# EAGLE board board (EAGLE 9.7.0)
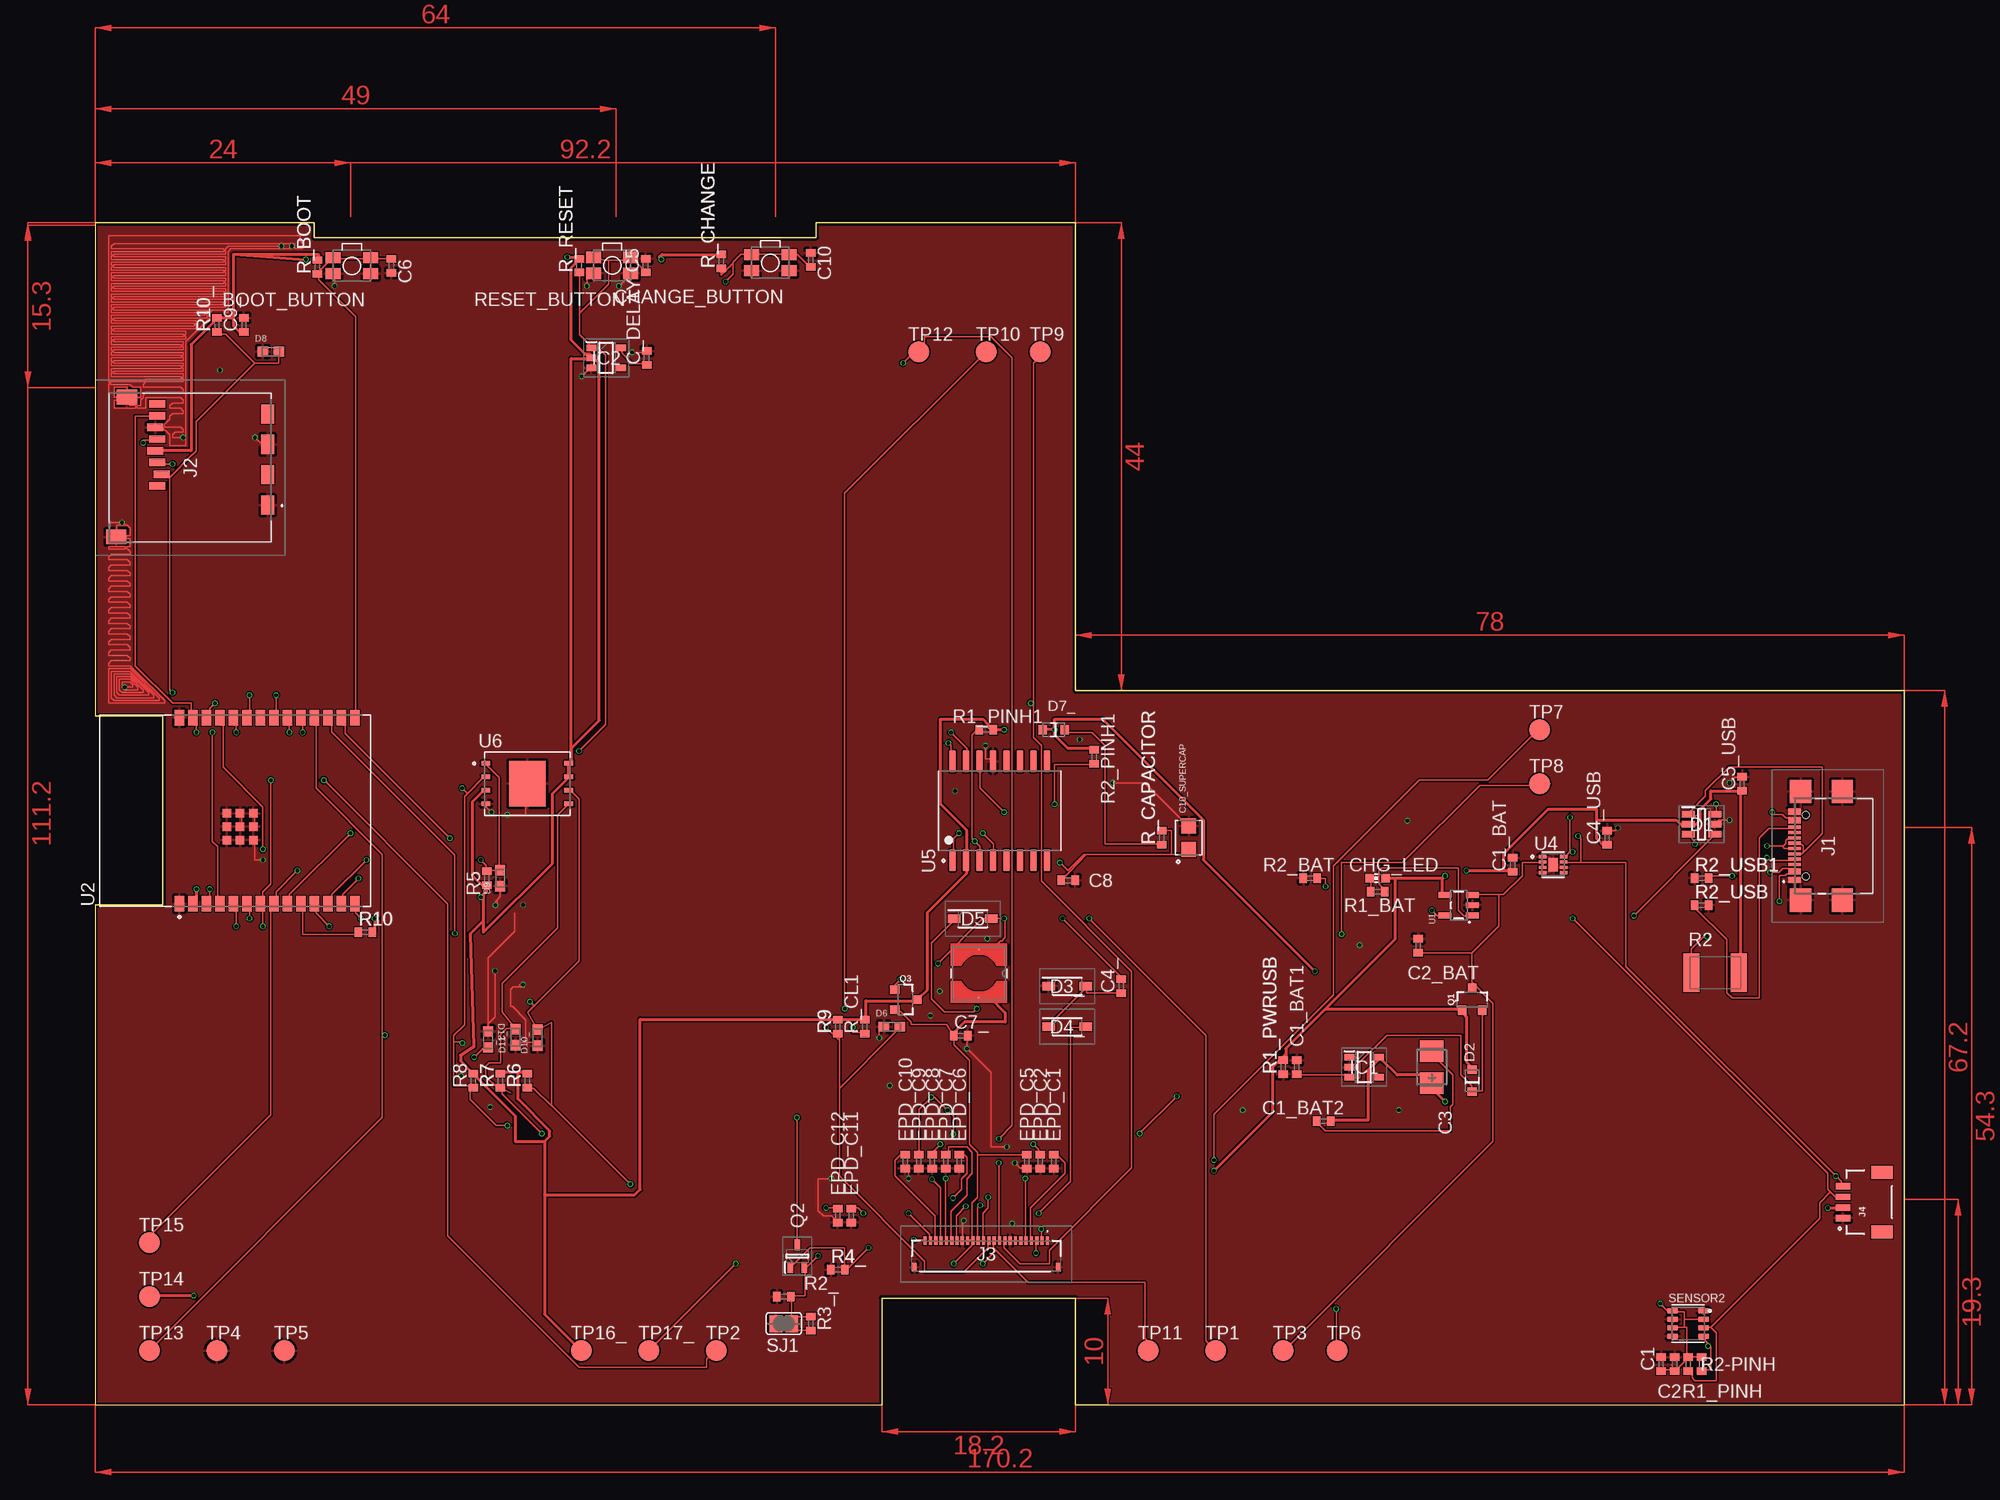
[diagram p0: board, top side]
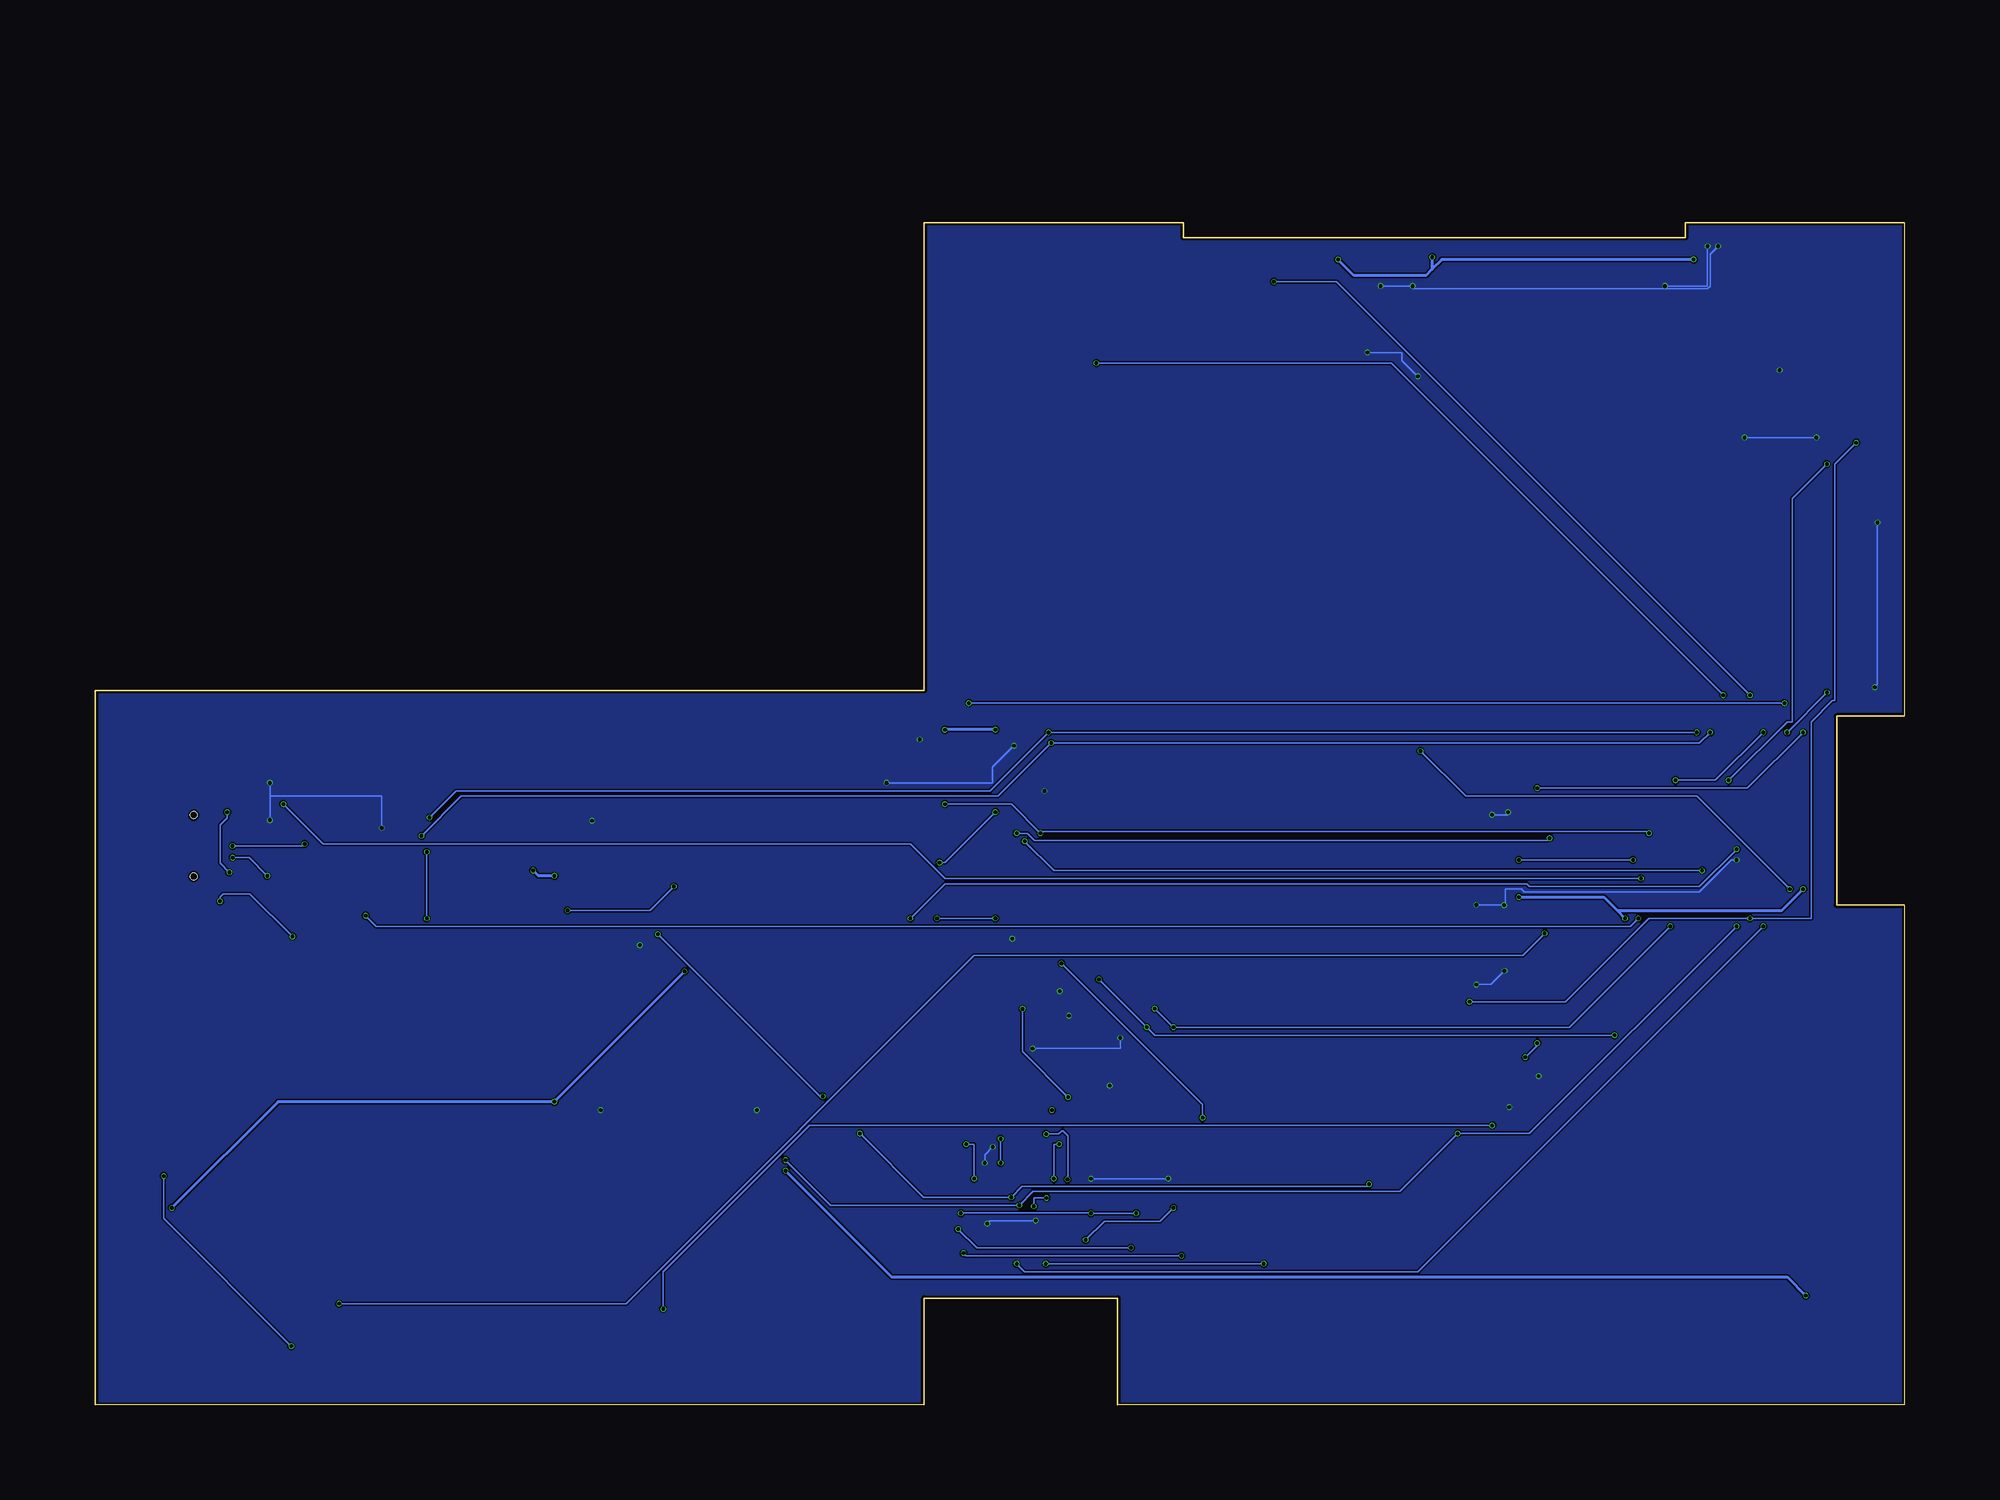
[diagram p1: board, bottom side, seen from below]

Size 170.2 x 111.2 mm. Coordinates in mm from the lower left corner, seen from the top.
Outline: 0,0 74,0 74,10 92.2,10 92.2,0 170.2,0 170.2,67.2 92.2,67.2 92.2,111.2 67.83,111.2 67.83,109.81 20.56,109.81 20.56,111.2 0,111.2 0,64.77 6.35,64.77 6.35,46.99 0,46.99 0,0
Copper layers (1*16): Top 0.035mm / dielectric 1.6mm / Bottom 0.035mm
Design rules "jlcpcb-2layers.dru *": minimum track width 5mil, minimum drill 0.3mm, track to track 5mil, track to pad 5mil, pad to pad 5mil, via to via 5mil, smd to smd 5mil, copper to edge 0.2mm, drill to drill 6mil, minimum pad ring 10mil, minimum via ring 3mil, stop-mask expansion 4mil, vias tented up to drill 0mil, thermal gap 10mil

## Footprints (pad centres in the part's own frame; a part is rotated, then mirrored left to right if it is on the bottom)
MYBUTTON = smd 1.4 x 1.05: 1 1.75,0.75; 2 -1.75,0.75; 3 -1.75,-0.75; 4 1.75,-0.75
EAGLE-LTSPICE_C0402 = smd 0.7 x 0.9: 1 -0.65,0; 2 0.65,0
RCL_CT3528 = smd 2 x 2.2: + -1.5,0; - 1.5,0
ESP32_WROVER_EAGLE-LTSPICE_C0402 = smd 0.7 x 0.9: 1 -0.65,0; 2 0.65,0
CAPCP3225X100N = smd 1.4 x 1.4: 1 -1.1,0; 2 1.1,0
ADAFRUIT_CHIP-LED0603 = smd 0.8 x 0.8: A 0,-0.75; C 0,0.75
SOT95P280X145-6N = smd 1.2 x 0.6: 1 -1.25,0.95; 2 -1.25,0; 3 -1.25,-0.95; 4 1.25,-0.95; 5 1.25,0; 6 1.25,0.95
ESP32_WROVER_AVX---SD0805S020S1R0_AVX_SD0805S020S1R0_0 = smd 0.8 x 0.9: 1 -1.05,0; 2 1.05,0
SOD3716X135N = smd 1.15 x 0.8: 1 -1.75,0; 2 1.75,0
DIOC1608X36N = smd 0.97 x 0.94: 1 -0.75,0; 2 0.75,0
SOT95P280X120-5N = smd 0.9 x 0.6: 1 -1.4,0.95; 2 -1.4,0; 3 -1.4,-0.95; 4 1.4,-0.95; 5 1.4,0.95
SOT95P280X125-5N = smd 0.9 x 0.6: 1 -1.4,0.95; 2 -1.4,0; 3 -1.4,-0.95; 4 1.4,-0.95; 5 1.4,0.95
SAMACSYS_PARTS_USB4110GFA = smd 0.3 x 1.15: A1 -3.35,3.678; A4 -2.55,3.678; A5 -1.25,3.678; A6 -0.25,3.678; A7 0.25,3.678; A8 1.25,3.678; A9 2.55,3.678; A12 3.35,3.678; B1 3.05,3.678; B4 2.25,3.678; B5 1.75,3.678; B6 0.75,3.678; B7 -0.75,3.678; B8 -1.75,3.678; B9 -2.25,3.678; B12 -3.05,3.678 | smd 2.18 x 2: MP1 -5.11,-0.827; MP2 5.11,-0.827; MP3 -5.11,3.103; MP4 5.11,3.103 | hole 0.65: -2.89,2.603; 2.89,2.603
112ATAARR03ATTEND = smd 1.8 x 1.2: G1 10.6,10.4; G2 4.9,10.4; S1 7.75,10.4; S2 2.05,10.4 | smd 1.4 x 1.9: G3 13.6,-3.85; G4 0.45,-2.85 | smd 0.7 x 1.5: P1 8.8,0; P2 7.7,0.4; P3 6.6,0; P4 5.5,-0.2; P5 4.4,0; P6 3.3,-0.2; P7 2.2,0; P8 1.1,0
FH34SRJ24S05SH99 = smd 0.3 x 0.8: 1 5.75,1.45; 2 5.25,1.45; 3 4.75,1.45; 4 4.25,1.45; 5 3.75,1.45; 6 3.25,1.45; 7 2.75,1.45; 8 2.25,1.45; 9 1.75,1.45; 10 1.25,1.45; 11 0.75,1.45; 12 0.25,1.45; 13 -0.25,1.45; 14 -0.75,1.45; 15 -1.25,1.45; 16 -1.75,1.45; 17 -2.25,1.45; 18 -2.75,1.45; 19 -3.25,1.45; 20 -3.75,1.45; 21 -4.25,1.45; 22 -4.75,1.45; 23 -5.25,1.45; 24 -5.75,1.45 | smd 0.4 x 0.8: MP1 6.75,-1.05; MP2 -6.75,-1.05
JST04_1MM_RA = smd 0.6 x 1.35: 1 -1.5,0; 2 -0.5,0; 3 0.5,0; 4 1.5,0 | smd 1.2 x 2: NC1 2.8,-3.675; NC2 -2.8,-3.675
IND_4828-WE-TPC_WRE = smd 0.127 x 0.127: 1 -2.286,0; 2 2.286,0
ESP32_WROVER_SPARKFUN-DISCRETESEMI_SOT23-3 = smd 0.8 x 0.9: 1 -0.95,-1; 2 0.95,-1; 3 0,1.1
SOT65P210X110-3N = smd 1.05 x 0.5: 1 -1.05,0.65; 2 -1.05,-0.65; 3 1.05,0
ESP32_WROVER_EAGLE-LTSPICE_R0402 = smd 0.7 x 0.9: 1 -0.65,0; 2 0.65,0
ESP32C6_VARISTOR_CT/CN1812 = smd 1.5 x 3.6: 1 -2.25,0; 2 2.25,0
ESP32_WROVER_BME680_PSON80P300X300X100-8N = smd 1.016 x 0.5: 1 1.458,1.2; 2 1.458,0.4; 3 1.458,-0.4; 4 1.458,-1.2; 5 -1.458,-1.22; 6 -1.458,-0.4; 7 -1.458,0.4; 8 -1.458,1.2
SJ = smd 1.168 x 1.6: 1 -0.762,0; 2 0.762,0
TP20R = smd 2 x 2: TP 0,0
ESP32_WROVER_SPARKFUN-IC-POWER_SOT23-5 = smd 0.55 x 1.2: 1 -0.95,-1.3; 2 0,-1.3; 3 0.95,-1.3; 4 0.95,1.3; 5 -0.95,1.3
XCVR_ESP32-C6-WROOM-1-N8 = smd 1.5 x 0.9: 1 -8.75,5.26; 2 -8.75,3.99; 3 -8.75,2.72; 4 -8.75,1.45; 5 -8.75,0.18; 6 -8.75,-1.09; 7 -8.75,-2.36; 8 -8.75,-3.63; 9 -8.75,-4.9; 10 -8.75,-6.17; 11 -8.75,-7.44; 12 -8.75,-8.71; 13 -8.75,-9.98; 14 -8.75,-11.25; 15 8.75,-11.25; 16 8.75,-9.98; 17 8.75,-8.71; 18 8.75,-7.44; 19 8.75,-6.17; 20 8.75,-4.9; 21 8.75,-3.63; 22 8.75,-2.36; 23 8.75,-1.09; 24 8.75,0.18; 25 8.75,1.45; 26 8.75,2.72; 27 8.75,3.99; 28 8.75,5.26 | smd 0.8 x 0.8: 29_1 -2.755,0.79; 29_2 -1.505,0.79; 29_3 -0.255,0.79; 29_4 -2.755,-0.46; 29_5 -1.505,-0.46; 29_6 -0.255,-0.46; 29_7 -2.755,-1.71; 29_8 -1.505,-1.71; 29_9 -0.255,-1.71
SON50P200X200X80-9N = smd 0.76 x 0.27: 1 -0.985,0.75; 2 -0.985,0.25; 3 -0.985,-0.25; 4 -0.985,-0.75; 5 0.985,-0.75; 6 0.985,-0.25; 7 0.985,0.25; 8 0.985,0.75 | smd 0.9 x 1.3: 9 0,0
SOIC127P1032X265-16N = smd 2.05 x 0.59: 1 -4.655,4.445; 2 -4.655,3.175; 3 -4.655,1.905; 4 -4.655,0.635; 5 -4.655,-0.635; 6 -4.655,-1.905; 7 -4.655,-3.175; 8 -4.655,-4.445; 9 4.655,-4.445; 10 4.655,-3.175; 11 4.655,-1.905; 12 4.655,-0.635; 13 4.655,0.635; 14 4.655,1.905; 15 4.655,3.175; 16 4.655,4.445
SON127P600X800X80-9N = smd 0.94 x 0.44: 1 -3.895,1.905; 2 -3.895,0.635; 3 -3.895,-0.635; 4 -3.895,-1.905; 5 3.895,-1.905; 6 3.895,-0.635; 7 3.895,0.635; 8 3.895,1.905 | smd 3.4 x 4.3: 9 0,0

## Placement (x,y rotation side)
BOOT_BUTTON  BUTTON_CUSYOMV1  [MYBUTTON]  24.13,107.16 180 top
C1  100nF  [EAGLE-LTSPICE_C0402]  147.32,3.81 90 top
C1_BAT  4.7uF  [EAGLE-LTSPICE_C0402]  133.35,50.8 90 top
C1_BAT1  4.7uF  [EAGLE-LTSPICE_C0402]  113.03,31.75 90 top
C1_BAT2  4.7uF  [EAGLE-LTSPICE_C0402]  115.57,26.67 180 top
C2  100nF  [EAGLE-LTSPICE_C0402]  148.59,3.81 90 top
C2_BAT  4.7uF  [EAGLE-LTSPICE_C0402]  124.46,43.18 90 top
C3  100uF  [RCL_CT3528]  125.73,31.75 90 top
C4_  4.7uF/25V  [EAGLE-LTSPICE_C0402]  96.52,39.37 90 top
C4_USB  100nF  [EAGLE-LTSPICE_C0402]  142.24,53.34 90 top
C5  1uF  [EAGLE-LTSPICE_C0402]  51.77,107.17 90 top
C5_USB  4.7uF  [EAGLE-LTSPICE_C0402]  154.94,58.42 90 top
C6  100nF  [ESP32_WROVER_EAGLE-LTSPICE_C0402]  27.84,107.14 270 top
C7_  10uF  [EAGLE-LTSPICE_C0402]  81.42,34.72 0 top
C8  100nF  [EAGLE-LTSPICE_C0402]  91.54,49.33 0 top
C9_  100nF  [ESP32_WROVER_EAGLE-LTSPICE_C0402]  13.97,101.6 90 top
C10  100nF  [ESP32_WROVER_EAGLE-LTSPICE_C0402]  67.31,107.72 90 top
C10_SUPERCAP  CPH3225A  [CAPCP3225X100N]  102.87,53.34 90 top
C_DELAY  100nF  [EAGLE-LTSPICE_C0402]  51.87,98.49 90 top
CHANGE_BUTTON  BUTTON_CUSYOMV1  [MYBUTTON]  63.5,107.44 180 top
CHG_LED  [ADAFRUIT_CHIP-LED0603]  120.65,49.53 90 top
D1  USBLC6-2SC6Y  [SOT95P280X145-6N]  151.13,54.61 0 top
D2  ESP32_WROVER_AVX---SD0805S020S1R0_AVX_SD0805S020S1R0_0_0AVX_SD0805S020S1R0_0_0  [ESP32_WROVER_AVX---SD0805S020S1R0_AVX_SD0805S020S1R0_0]  129.54,30.48 90 top
D3_  MBR0530  [SOD3716X135N]  91.44,39.37 0 top
D4_  MBR0530  [SOD3716X135N]  91.44,35.56 0 top
D5  MBR0530  [SOD3716X135N]  82.55,45.72 0 top
D6  PGB1010603MR  [DIOC1608X36N]  74.93,35.56 0 top
D7_  ESP32_WROVER_AVX---SD0805S020S1R0_AVX_SD0805S020S1R0_0_0AVX_SD0805S020S1R0_0_0  [ESP32_WROVER_AVX---SD0805S020S1R0_AVX_SD0805S020S1R0_0]  90.17,63.5 180 top
D8  PGB1010603MR  [DIOC1608X36N]  16.51,99.06 0 top
D9  PGB1010603MR  [DIOC1608X36N]  38.1,49.53 90 top
D10_  PGB1010603MR  [DIOC1608X36N]  41.62,34.52 90 top
D11_  PGB1010603MR  [DIOC1608X36N]  39.52,34.58 90 top
D12_  PGB1010603MR  [DIOC1608X36N]  36.94,34.36 270.6 top
EPD_C1  1uF/50V  [EAGLE-LTSPICE_C0402]  90.17,22.86 90 top
EPD_C2  1uF/50V  [EAGLE-LTSPICE_C0402]  88.9,22.86 90 top
EPD_C5  1uF/50V  [EAGLE-LTSPICE_C0402]  87.63,22.86 90 top
EPD_C6  1uF/50V  [EAGLE-LTSPICE_C0402]  81.28,22.86 90 top
EPD_C7  1uF/50V  [EAGLE-LTSPICE_C0402]  80.01,22.86 90 top
EPD_C8  1uF/50V  [EAGLE-LTSPICE_C0402]  78.74,22.86 90 top
EPD_C9  1uF/50V  [EAGLE-LTSPICE_C0402]  77.47,22.86 90 top
EPD_C10  1uF/50V  [EAGLE-LTSPICE_C0402]  76.2,22.86 90 top
EPD_C11  1uF/50V  [EAGLE-LTSPICE_C0402]  71.12,17.78 90 top
EPD_C12  1uF/50V  [EAGLE-LTSPICE_C0402]  69.85,17.78 90 top
IC1  XC6220A331MR-G  [SOT95P280X120-5N]  119.38,31.75 0 top
IC2  BD5229G-TR  [SOT95P280X125-5N]  48.06,98.49 0 top
J1  SAMACSYS_PARTS_USB4110-GF-A  [SAMACSYS_PARTS_USB4110GFA]  163.55,52.57 90 top
J2  112A-TAAR-R03_ATTEND  [112ATAARR03ATTEND]  5.82,95.25 270 top
J3  FH34SRJ-24S-0.5SH_99_  [FH34SRJ24S05SH99]  83.82,13.97 0 top
J4  QWIIC_RIGHT_ANGLE  [JST04_1MM_RA]  164.43,19.05 90 top
L1  744043680IND_4828-WE-TPC_WRE  [IND_4828-WE-TPC_WRE]  83.13,40.58 270 top
Q1  20V/4.2A/52mΩ/1.4W  [ESP32_WROVER_SPARKFUN-DISCRETESEMI_SOT23-3]  129.54,38.1 0 top
Q2  SI1308EDL-T1-GE3  [SOT65P210X110-3N]  66.04,13.97 90 top
Q3  20V/4.2A/52mΩ/1.4W  [ESP32_WROVER_SPARKFUN-DISCRETESEMI_SOT23-3]  76.2,38.1 270 top
R1_BAT  200  [ESP32_WROVER_EAGLE-LTSPICE_R0402]  120.65,48.26 0 top
R1_PINH  10k  [ESP32_WROVER_EAGLE-LTSPICE_R0402]  149.86,3.81 90 top
R1_PINH1  10k  [ESP32_WROVER_EAGLE-LTSPICE_R0402]  83.82,63.5 0 top
R1_PWRUSB  100k  [ESP32_WROVER_EAGLE-LTSPICE_R0402]  111.76,31.75 90 top
R2  ESP32C6_VARISTORCN1812  [ESP32C6_VARISTOR_CT/CN1812]  152.4,40.64 0 top
R2-PINH  10k  [ESP32_WROVER_EAGLE-LTSPICE_R0402]  151.13,3.81 90 top
R2_  2.2  [ESP32_WROVER_EAGLE-LTSPICE_R0402]  64.77,10.16 0 top
R2_BAT  2k  [ESP32_WROVER_EAGLE-LTSPICE_R0402]  114.3,49.53 0 top
R2_PINH1  10k  [ESP32_WROVER_EAGLE-LTSPICE_R0402]  93.98,60.96 90 top
R2_USB  5k1  [ESP32_WROVER_EAGLE-LTSPICE_R0402]  151.13,46.99 0 top
R2_USB1  5k1  [ESP32_WROVER_EAGLE-LTSPICE_R0402]  151.13,49.53 0 top
R3_  0.47  [ESP32_WROVER_EAGLE-LTSPICE_R0402]  67.31,7.62 90 top
R4_  10k  [ESP32_WROVER_EAGLE-LTSPICE_R0402]  69.85,12.7 0 top
R5  10k  [ESP32_WROVER_EAGLE-LTSPICE_R0402]  36.83,49.53 270 top
R6  10k  [ESP32_WROVER_EAGLE-LTSPICE_R0402]  40.64,30.48 90 top
R7  10k  [ESP32_WROVER_EAGLE-LTSPICE_R0402]  38.1,30.48 90 top
R8  10k  [ESP32_WROVER_EAGLE-LTSPICE_R0402]  35.56,30.48 90 top
R9  10k  [ESP32_WROVER_EAGLE-LTSPICE_R0402]  69.85,35.56 90 top
R10  10k  [ESP32_WROVER_EAGLE-LTSPICE_R0402]  25.4,44.45 0 top
R10_  10k  [ESP32_WROVER_EAGLE-LTSPICE_R0402]  11.43,101.6 90 top
R_BOOT  10k  [ESP32_WROVER_EAGLE-LTSPICE_R0402]  20.88,107.04 90 top
R_CAPACITOR  15  [ESP32_WROVER_EAGLE-LTSPICE_R0402]  100.33,53.34 90 top
R_CHANGE  10k  [ESP32_WROVER_EAGLE-LTSPICE_R0402]  58.89,107.58 90 top
R_CL1  10k  [ESP32_WROVER_EAGLE-LTSPICE_R0402]  72.39,35.56 90 top
R_RESET  10k  [ESP32_WROVER_EAGLE-LTSPICE_R0402]  45.52,107.17 90 top
RESET_BUTTON  BUTTON_CUSYOMV1  [MYBUTTON]  48.62,107.19 180 top
SENSOR2  ESP32_WROVER_BME680_BME680  [ESP32_WROVER_BME680_PSON80P300X300X100-8N]  149.86,7.62 0 top
SJ1  [SJ]  64.77,7.62 0 top
TP1  TPTP20R  [TP20R]  105.41,5.08 0 top
TP2  TPTP20R  [TP20R]  58.42,5.08 0 top
TP3  TPTP20R  [TP20R]  111.76,5.08 0 top
TP4  TPTP20R  [TP20R]  11.43,5.08 0 top
TP5  TPTP20R  [TP20R]  17.78,5.08 0 top
TP6  TPTP20R  [TP20R]  116.84,5.08 0 top
TP7  TPTP20R  [TP20R]  135.89,63.5 0 top
TP8  TPTP20R  [TP20R]  135.89,58.42 0 top
TP9  TPTP20R  [TP20R]  88.9,99.06 0 top
TP10  TPTP20R  [TP20R]  83.82,99.06 0 top
TP11  TPTP20R  [TP20R]  99.06,5.08 0 top
TP12  TPTP20R  [TP20R]  77.47,99.06 0 top
TP13  TPTP20R  [TP20R]  5.08,5.08 0 top
TP14  TPTP20R  [TP20R]  5.08,10.16 0 top
TP15  TPTP20R  [TP20R]  5.08,15.24 0 top
TP16_  TPTP20R  [TP20R]  45.72,5.08 0 top
TP17_  TPTP20R  [TP20R]  52.07,5.08 0 top
U1  ESP32_WROVER_SPARKFUN-IC-POWER_MCP73831  [ESP32_WROVER_SPARKFUN-IC-POWER_SOT23-5]  128.27,46.99 90 top
U2  ESP32-C6-WROOM-1-N8  [XCVR_ESP32-C6-WROOM-1-N8]  13.15,55.88 90 top
U4  MAX17048G+T10  [SON50P200X200X80-9N]  137.16,50.8 0 top
U5  DS3231SN#  [SOIC127P1032X265-16N]  85.09,55.88 90 top
U6  W25Q512JVEIQ  [SON127P600X800X80-9N]  40.64,58.42 0 top

## Library data of the parts
BOOT_BUTTON CHANGE_BUTTON CHG_LED R2 RESET_BUTTON SJ1 TP1-TP15 TP16_ TP17_ = DeskAssistant v19 v1
C1 C1_BAT C1_BAT1 C1_BAT2 C2 C2_BAT C4_ C4_USB C5 C5_USB C6 C7_ C8 C9_ C10 C_DELAY EPD_C1 EPD_C2 EPD_C5-EPD_C12 = DeskAssistant v19 v1; SPICEMODEL: NONE; SPICEPREFIX: C
C3 = DeskAssistant v19 v1; SPICEPREFIX: C
C10_SUPERCAP = DeskAssistant v19 v1; AVAILABILITY: Not in stock; CHECK_PRICES: https://www.snapeda.com/parts/CPH3225A/Seiko+Instruments/view-part/?ref=eda; DESCRIPTION: 11 mF (EDLC) Supercapacitor 3.3 V 1210 (3225 Metric) - -; MF: Seiko Instruments; MP: CPH3225A; PACKAGE: 1210 Seiko; PRICE: None; PURCHASE-URL: https://www.snapeda.com/api/url_track_click_mouser/?unipart_id=562593&manufacturer=Seiko Instruments&part_name=CPH3225A&search_term=None; SNAPEDA_LINK: https://www.snapeda.com/parts/CPH3225A/Seiko+Instruments/view-part/?ref=snap
D1 = DeskAssistant v19 v1; AVAILABILITY: In Stock; CHECK_PRICES: https://www.snapeda.com/parts/USBLC6-2SC6Y/STMicroelectronics/view-part/?ref=eda; DESCRIPTION: 17V Clamp 5A (8/20µs) Ipp Tvs Diode Surface Mount SOT-23-6; MF: STMicroelectronics; MP: USBLC6-2SC6Y; PACKAGE: SOT-23-6 STMicroelectronics; PRICE: None; SNAPEDA_LINK: https://www.snapeda.com/parts/USBLC6-2SC6Y/STMicroelectronics/view-part/?ref=snap
D2 D7_ = DeskAssistant v19 v1; CENTROID_NOT_SPECIFIED: No; DATASHEET: http://datasheets.avx.com/schottky.pdf; DIGIKEY_DESCRIPTION: DIODE SCHOTTKY 20V 1A 0805; DIGIKEY_PART_NUMBER: 478-7800-1-ND; LEAD_FREE: yes; MF: AVX; MOUSER_PART_NUMBER: 581-SD0805S020S1R0; PACKAGE: 0805 (2012 metric); PREFIX: D; ROHS: yes; TEMPERATURE_RANGE_HIGH: +125°C; TEMPERATURE_RANGE_LOW: -55°C
D3_ D4_ D5 = DeskAssistant v19 v1; AVAILABILITY: In Stock; CHECK_PRICES: https://www.snapeda.com/parts/MBR0530/Onsemi/view-part/?ref=eda; DESCRIPTION: Diode Schottky 30 V 500mA Surface Mount SOD-123; MF: ON Semiconductor; MP: MBR0530; PACKAGE: SOD-123-2 ON Semiconductor; PRICE: None; PURCHASE-URL: https://www.snapeda.com/api/url_track_click_mouser/?unipart_id=179458&manufacturer=ON Semiconductor&part_name=MBR0530&search_term=None; SNAPEDA_LINK: https://www.snapeda.com/parts/MBR0530/Onsemi/view-part/?ref=snap
D6 D8 D9 D10_ D11_ D12_ = DeskAssistant v19 v1; AVAILABILITY: In Stock; CHECK_PRICES: https://www.snapeda.com/parts/PGB1010603MR/Littelfuse/view-part/?ref=eda; DESCRIPTION: 150V (Typ) Clamp - Ipp Tvs Diode Surface Mount 0603 (1608 Metric); MF: Littelfuse Inc.; MP: PGB1010603MR; PACKAGE: 0603 Littelfuse Inc.; PRICE: None; PURCHASE-URL: https://www.snapeda.com/api/url_track_click_mouser/?unipart_id=5659453&manufacturer=Littelfuse Inc.&part_name=PGB1010603MR&search_term=None; SNAPEDA_LINK: https://www.snapeda.com/parts/PGB1010603MR/Littelfuse/view-part/?ref=snap
IC1 = DeskAssistant v19 v1; DESCRIPTION: LDO Voltage Regulators; HEIGHT: 1.2mm; MANUFACTURER_NAME: Torex; MANUFACTURER_PART_NUMBER: XC6220A331MR-G; MOUSER_PART_NUMBER: 865-XC6220A331MR-G; MOUSER_PRICE-STOCK: https://www.mouser.co.uk/ProductDetail/Torex-Semiconductor/XC6220A331MR-G?qs=AsjdqWjXhJ8ZSWznL1J0gg%3D%3D
IC2 = DeskAssistant v19 v1; DESCRIPTION: Voltage Detector with Adjustable Delay Time: CMOS processes are utilized to develop high precision, low current consumption CMOS reset ICs that allow arbitrary setting of the delay time. The extensive lineup includes both Nch Open Drain and CMOS output types in a wide range of detection voltages (from 2.3V to 6.0V, in 0.1V steps), enabling selection of the ideal solution based on customer requirements. In addition, the entire series is of course both lead-free and RoHS-compliant.; HEIGHT: 1.25mm; MANUFACTURER_NAME: ROHM Semiconductor; MANUFACTURER_PART_NUMBER: BD5229G-TR; MOUSER_PART_NUMBER: 755-BD5229G-TR; MOUSER_PRICE-STOCK: https://www.mouser.co.uk/ProductDetail/ROHM-Semiconductor/BD5229G-TR?qs=4kLU8WoGk0vvnhrrYwdszw%3D%3D
J1 = DeskAssistant v19 v1; DESCRIPTION: CONN USB 2.0 TYPE-C R/A SMT; HEIGHT: 3.26mm; MANUFACTURER_NAME: GCT (GLOBAL CONNECTOR TECHNOLOGY); MANUFACTURER_PART_NUMBER: USB4110-GF-A; MOUSER_PART_NUMBER: 640-USB4110-GF-A; MOUSER_PRICE-STOCK: https://www.mouser.co.uk/ProductDetail/GCT/USB4110-GF-A?qs=KUoIvG%2F9IlYiZvIXQjyJeA%3D%3D
J2 = DeskAssistant v19 v1; DESCRIPTION: Micro SD Card Socket, Push-Push Type, Top Mount, SMT, H=1.83mm, 10u; HEIGHT: 1.9mm; MANUFACTURER_NAME: ATTEND; MANUFACTURER_PART_NUMBER: 112A-TAAR-R03 ATTEND
J3 = DeskAssistant v19 v1; DESCRIPTION: 24 Position FFC, FPC Connector Contacts, Top and Bottom 0.020" (0.50mm) Surface Mount, Right Angle; HEIGHT: 1.1mm; MANUFACTURER_NAME: Hirose; MANUFACTURER_PART_NUMBER: FH34SRJ-24S-0.5SH(99); MOUSER_PART_NUMBER: 798-FH34SRJ24S05SH99; MOUSER_PRICE-STOCK: https://www.mouser.co.uk/ProductDetail/Hirose-Connector/FH34SRJ-24S-0.5SH99?qs=vcbW%252B4%252BSTIpKBl5ap9J8Fw%3D%3D
J4 = DeskAssistant v19 v1; PROD_ID: CONN-13694
L1 = DeskAssistant v19 v1; COPYRIGHT: Copyright (C) 2024 Ultra Librarian. All rights reserved.; MANUFACTURER_PART_NUMBER: 744043680; MFR_NAME: Wurth Electronics
Q1 Q3 = DeskAssistant v19 v1; PROD_ID: TRAN-14388
Q2 = DeskAssistant v19 v1; AVAILABILITY: In Stock; CHECK_PRICES: https://www.snapeda.com/parts/SI1308EDL-T1-GE3/Vishay+Siliconix/view-part/?ref=eda; DESCRIPTION: Si1308EDL-T1-GE3 N-channel MOSFET Transistor, 1.5 A, 30 V, 3-Pin SC-70 | Siliconix / Vishay SI1308EDL-T1-GE3; MF: Vishay Siliconix; MP: SI1308EDL-T1-GE3; PACKAGE: SOT-323 Vishay Semiconductor; PRICE: None; PURCHASE-URL: https://www.snapeda.com/api/url_track_click_mouser/?unipart_id=274603&manufacturer=Vishay Siliconix&part_name=SI1308EDL-T1-GE3&search_term=None; SNAPEDA_LINK: https://www.snapeda.com/parts/SI1308EDL-T1-GE3/Vishay+Siliconix/view-part/?ref=snap
R1_BAT R1_PINH R1_PINH1 R1_PWRUSB R2-PINH R2_ R2_BAT R2_PINH1 R2_USB R2_USB1 R3_ R4_ R5-R10 R10_ R_BOOT R_CAPACITOR R_CHANGE R_CL1 R_RESET = DeskAssistant v19 v1; SPICEMODEL: NONE; SPICEPREFIX: R
SENSOR2 = DeskAssistant v19 v1; AVAILABILITY: Unavailable; DESCRIPTION: Integrated Environmental Unit; MF: Bosch Sensortec; MP: BME680; PACKAGE: LGA-8 Bosch Tools; PRICE: None
U1 = DeskAssistant v19 v1; PROD_ID: IC-09995
U2 = DeskAssistant v19 v1; AVAILABILITY: In Stock; CHECK_PRICES: https://www.snapeda.com/parts/ESP32-C6-WROOM-1-N8/Espressif+Systems/view-part/?ref=eda; DESCRIPTION: Multiprotocol Modules ESP32-C6 module, Wi-Fi 6 in 2.4 GHz band, Bluetooth 5, Zigbee 3.0 and Thread. ESP34-WROOM Compatible - ENGINEERING SAMPLE; MF: Espressif Systems; MP: ESP32-C6-WROOM-1-N8; PACKAGE: None; PRICE: None; SNAPEDA_LINK: https://www.snapeda.com/parts/ESP32-C6-WROOM-1-N8/Espressif+Systems/view-part/?ref=snap
U4 = DeskAssistant v19 v1; AVAILABILITY: In Stock; CHECK_PRICES: https://www.snapeda.com/parts/MAX17048G+T10/Analog+Devices/view-part/?ref=eda; DESCRIPTION: 3µA 1-Cell/2-Cell Fuel Gauge with ModelGauge; MF: Analog Devices; MP: MAX17048G+T10; PACKAGE: TDFN-8 Maxim; PRICE: None; PURCHASE-URL: https://www.snapeda.com/api/url_track_click_mouser/?unipart_id=329239&manufacturer=Analog Devices&part_name=MAX17048G+T10&search_term=None; SNAPEDA_LINK: https://www.snapeda.com/parts/MAX17048G+T10/Analog+Devices/view-part/?ref=snap
U5 = DeskAssistant v19 v1; AVAILABILITY: In Stock; CHECK_PRICES: https://www.snapeda.com/parts/DS3231SN%23/Analog+Devices/view-part/?ref=eda; DESCRIPTION: Extremely Accurate I²C-Integrated RTC/TCXO/Crystal; MF: Analog Devices; MP: DS3231SN#; PACKAGE: SOIC-16 Maxim; PRICE: None; PURCHASE-URL: https://www.snapeda.com/api/url_track_click_mouser/?unipart_id=99048&manufacturer=Analog Devices&part_name=DS3231SN#&search_term=None; SNAPEDA_LINK: https://www.snapeda.com/parts/DS3231SN%23/Analog+Devices/view-part/?ref=snap
U6 = DeskAssistant v19 v1; AVAILABILITY: In Stock; CHECK_PRICES: https://www.snapeda.com/parts/W25Q512JVEIQ/Winbond+Electronics/view-part/?ref=eda; DESCRIPTION: FLASH - NOR Memory IC 512Mb (64M x 8) SPI - Quad I/O 133 MHz 8-WSON (8x6); MF: Winbond Electronics; MP: W25Q512JVEIQ; PACKAGE: Package; PRICE: None; SNAPEDA_LINK: https://www.snapeda.com/parts/W25Q512JVEIQ/Winbond+Electronics/view-part/?ref=snap

## Nets
3V3: C1_BAT2.1 C3.+ C9_.1 D7_.2 IC1.5 IC2.2 J2.P4 J4.2 Q3.3 R1_PINH1.2 R2_PINH1.2 R5.2 R6.2 R7.2 R8.2 R9.2 R10.2 R10_.2 R_BOOT.2 R_CHANGE.2 R_CL1.2 R_RESET.2 TP16_.TP U2.2 U5.2 U6.3 U6.7 U6.8
12C_PW: C1.1 C2.1 R1_PINH.2 R2-PINH.2 SENSOR2.2 SENSOR2.6 SENSOR2.8 U2.17
32KHZ: R2_PINH1.1 U2.9 U5.1
DN: D1.1 J1.A7 J1.B7
DP: D1.3 J1.A6 J1.B6
EPD_3V3: C7_.1 EPD_C5.2 J3.15 J3.16 L1.2 Q3.2 TP17_.TP
EPD_3V3_C: Q3.1 R_CL1.1 TP13.TP U2.18
EPD_BUSY: J3.9 TP9.TP U2.26
EPD_CS: D6.2 J3.12 R9.1 TP10.TP U2.11
EPD_DC: J3.11 TP11.TP U2.5
EPD_RST: J3.10 TP12.TP U2.21
FLASH_CS: D9.2 R5.1 U2.12 U6.1
GDR: J3.2 Q2.1 R4_.2
GND: BOOT_BUTTON.1 BOOT_BUTTON.2 C1.2 C1_BAT1.2 C1_BAT.2 C2.2 C2_BAT.2 C4_USB.2 C5.2 C5_USB.2 C6.2 C7_.2 C8.2 C9_.2 C10.2 C10_SUPERCAP.2 C_DELAY.2 CHANGE_BUTTON.1 CHANGE_BUTTON.2 D1.5 D3_.1 D6.1 D8.1 D9.1 D10_.1 D11_.1 D12_.1 EPD_C1.1 EPD_C2.1 EPD_C5.1 EPD_C6.1 EPD_C7.1 EPD_C8.1 EPD_C9.1 EPD_C10.1 EPD_C11.1 EPD_C12.1 IC1.2 IC2.3 J1.A1 J1.A12 J1.B1 J1.B12 J1.MP1 J1.MP2 J1.MP3 J1.MP4 J2.G1 J2.G2 J2.G3 J2.G4 J2.P6 J3.8 J3.17 J3.MP1 J3.MP2 J4.1 R1_PWRUSB.1 R2_.1 R2_BAT.1 R2_USB1.1 R2_USB.2 R4_.1 RESET_BUTTON.1 RESET_BUTTON.2 SENSOR2.1 SENSOR2.5 SENSOR2.7 SJ1.1 TP4.TP TP5.TP U1.2 U2.1 U2.28 U2.29_1 U2.29_2 U2.29_3 U2.29_4 U2.29_5 U2.29_6 U2.29_7 U2.29_8 U2.29_9 U4.1 U4.4 U4.6 U4.9 U5.13 U6.4 U6.9
GPIO8: R10.1 U2.10
INT_RTC: R1_PINH1.1 TP15.TP U2.8 U5.3
IO/BOOT: BOOT_BUTTON.3 BOOT_BUTTON.4 C6.1 R_BOOT.1 U2.15
IO/CHANGE: C10.1 CHANGE_BUTTON.3 CHANGE_BUTTON.4 R_CHANGE.1 U2.23
MISO: D12_.2 J2.P7 R8.1 TP6.TP U2.27 U6.2
MOSI: D11_.2 J2.P3 J3.14 R7.1 TP7.TP U2.7 U6.5
N$1: J1.A4 R2.1
N$2: J1.A5 R2_USB1.2
N$3: J1.B5 R2_USB.1
N$4: C1_BAT1.1 D2.1 IC1.1 IC1.3 Q1.2
N$5: C4_.1 D3_.2 D4_.1
N$6: C1_BAT2.2 C3.-
N$7: EPD_C12.2 J3.24
N$8: EPD_C1.2 J3.4
N$9: C_DELAY.1 IC2.5
N$10: R2_BAT.2 U1.5
N$11: EPD_C2.2 J3.5
N$12: EPD_C10.2 J3.22
N$13: D7_.1 R_CAPACITOR.1
N$14: R1_BAT.2 U1.1
N$15: CHG_LED.C R1_BAT.1
N$16: EPD_C8.2 J3.20
N$17: EPD_C7.2 J3.19
N$18: EPD_C6.2 J3.18
PREVGH: D5.1 EPD_C9.2 J3.21
PREVGL: D4_.2 EPD_C11.2 J3.23
RESE: J3.3 Q2.2 R2_.2 R3_.1 R3_.2 SJ1.2
RESET: C5.1 IC2.1 R_RESET.1 RESET_BUTTON.3 RESET_BUTTON.4 U2.3
RTC_RTS: U2.16 U5.4
RX: TP2.TP U2.24
SCK: D10_.2 J2.P5 J3.13 R6.1 TP8.TP U2.6 U6.6
SCL: J4.4 R2-PINH.1 SENSOR2.4 U2.20 U4.7 U5.16
SDA: J4.3 R1_PINH.1 SENSOR2.3 U2.19 U4.8 U5.15
SRC: C4_.2 D5.2 L1.1 Q2.3
SS_SD: D8.2 J2.P2 R10_.1 U2.4
TX: TP1.TP U2.25
USB_D+: D1.4 U2.14
USB_D-: D1.6 U2.13
VBAT: C2_BAT.1 Q1.3 TP3.TP U1.3 U4.2 U4.3
VBUS: C1_BAT.1 C4_USB.1 C5_USB.1 CHG_LED.A D1.2 D2.2 Q1.1 R1_PWRUSB.2 R2.2 TP14.TP U1.4
VRTC: C8.1 C10_SUPERCAP.1 R_CAPACITOR.2 U5.14
VUSB: J1.A9 J1.B4 J1.B9

## Tracks (layer width: path | path; a pad name or v marks a point on that pad's centre or on a via)
3V3  (via drill 0.35)
  Top 0.152: R8.2 35.5,31.25 35.6,31.23
  Top 0.3: IC2.2 46.55,98.43 44.8,98.43 44.75,98.38 44.75,60.5 U6.8 | v53.25,107.75 53.05,107.95 53.33,108.23 R_CHANGE.2 | 13,102.25 R10_.2 11.25,102.25 11.25,102 9,99.75 9,89.75 J2.P4 | 13,102.25 13,101.5 13.75,100.75 C9_.1 | 13,102.25 13,108.24 | 13,108.24 13,108.25 21,108.25 20.83,107.73 R_BOOT.2 | 13,108.24 v19.8,107.75 | C1_BAT2.1 116.25,26.75 119.75,26.75 119.75,31.5 120.75,32.5 IC1.5 121,32.5 122.5,31 125.5,31 125.5,30.25 C3.+ 125.75,30.25 125.75,29.75 v127,28.5 | v163,18.5 164.25,18.5 J4.2 | v90.25,63.5 D7_.2 | v90.25,63.5 90.25,63 91.5,61.75 93.75,61.75 R2_PINH1.2 | v85.5,63.5 R1_PINH1.2 84.25,63.5 84,63.75 84,64 83.5,64.5 79.5,64.5 79.5,56.5 82,54 82,51.25 U5.2 82,51 82,50 78.29,46.29 78.29,39.04 77.5,38.25 Q3.3 77.25,38 72.5,38 72.5,36.25 R_CL1.2 72.25,36.25 70,36.25 R9.2 69.75,36.25 51.25,36.25 51.25,20.25 50.75,19.75 42.25,19.75 | 39.75,31.25 40.5,31.25 R6.2 | 39.75,31.25 38.25,31.25 R7.2 | U6.8 44.5,60.25 44.5,59.25 U6.7 44.5,59 43,57.5 43,50.94 36.5,44.44 36.5,45.5 | v26.25,45.75 26.25,44.5 R10.2 | 36.5,48 36.75,48.25 36.75,48.5 | 36.75,48.5 36.75,48.75 R5.2 | 36.5,48 36.5,45.5 | R8.2 34.34,32.35 34.34,32.86 35.6,33.65 35.27,44.27 36.5,45.5 | 36.5,48 v36.25,47.75 | 36.75,48.5 35.5,49.75 35.5,56.75 36.5,57.75 U6.3 | v9.5,48.5 9.5,47.5 9.25,47.25 U2.2 | 39.75,31.25 39.75,28.75 42.75,25.75 42.75,25.25 42.25,24.75 | 42.25,24.75 39.5,24.75 39.5,27.16 35.6,31.06 35.6,31.23 | 42.25,24.75 42.25,19.75 | 42.25,19.75 42.25,8.5 45.5,5.25 TP16_.TP | v114.75,40.75 104.25,51.25 104.25,55 94.75,64.5 90.25,64.5 v90.25,63.5 | U6.8 44.82,60.61 44.82,61.78 47.41,64.38 47.41,97.97 46.54,98.84 46.09,98.84 44.77,100.16 44.77,106.99 45.52,107.75
  Top 0.3: 45.52,107.75 R_RESET.2 | v44.4,107.97 45.3,107.97 45.52,107.75
  Bottom 0.3: v53.25,107.75 51.75,106.25 45,106.25 44.42,106.83 | 44.42,106.83 43.5,107.75 v19.8,107.75 | v163,18.5 153,28.5 v127,28.5 v114.75,40.75 | v85.5,63.5 v90.25,63.5 | 27,46.5 28.25,47.75 v36.25,47.75 | 27,46.5 v26.25,45.75 | v9.5,48.5 11.5,46.5 27,46.5 | v44.4,107.97 44.42,107.95 44.42,106.83
12C_PW  (via drill 0.35)
  Top 0.152: C1.1 147.5,3.25 148.5,3.25 C2.1 148.75,3.25 149.5,4 149.5,4.25 149.75,4.5 | R2-PINH.2 151,4.5 150,4.5 R1_PINH.2 149.75,4.5 | 149.5,7.25 149.75,7.25 149.75,4.5 | 149.5,7.25 148.5,7.25 SENSOR2.6 | 149.5,7.25 149.5,8 | 149.5,8 149.5,8.75 148.5,8.75 SENSOR2.8 148.25,8.75 148,8.75 v147.25,9.5 | 149.5,8 151.25,8 SENSOR2.2 | v33.81,44.33 33.81,51.73 22.25,63.29 22.25,64.25 22,64.5 U2.17
  Bottom 0.152: v33.81,44.33 35.89,42.25 87.5,42.25 120.25,9.5 v147.25,9.5
32KHZ  (via drill 0.35)
  Top 0.152: v90.25,56.5 90.25,60.25 93.75,60.25 R2_PINH1.1 | v81.25,53.75 80.75,53.25 80.75,51.25 U5.1 | v24,53.75 18.25,48 18.25,47.25 U2.9
  Bottom 0.152: v90.25,56.5 84,56.5 v81.25,53.75 81.09,53.91 24.16,53.91 v24,53.75
DN
  Top 0.152: 160.75,52 162.5,53.75 162.5,60 153.72,60 151.5,57.78 151.5,57.25 150,55.75 D1.1 | J1.A7 159.99,52.7 160.56,52.7 160.7,52.56 160.7,52.05 160.75,52 | 160.75,52 160.57,51.82 J1.B7
DP  (via drill 0.35)
  Top 0.152: v150.5,52.75 150.5,53 150,53.5 D1.3 | 158.81,52.56 v157.28,52.56 | J1.B6 159.75,53.2 159.2,53.2 159.07,53.06 159.07,52.82 158.81,52.56 | J1.A6 158.93,52.32 158.75,52.5 158.81,52.56
  Bottom 0.152: v150.5,52.75 150.69,52.56 v157.28,52.56
EPD_3V3  (via drill 0.35)
  Top 0.152: Q3.2 75.25,37 75.75,37 76.75,36 76.75,35.75 80.06,35.75 80.67,34.87 C7_.1 80.77,33.86 82.25,32.38 82.25,24.5 83,23.75 83,23.5 | 82.5,15.5 82,15.5 J3.16 | 83,23.5 87.5,23.5 EPD_C5.2 | 83,23.5 83,19.5 82.5,19 82.5,15.5 | 82.5,15.5 J3.15 82.5,15.25 82.5,15 v80.75,13.25 | v60.25,13.25 52.25,5.25 TP17_.TP
  Top 0.3: L1.2 84.15,38.29 85.59,36.85 85.59,36 81.8,36 80.67,34.87
  Bottom 0.152: v80.75,13.25 v60.25,13.25
EPD_3V3_C  (via drill 0.35)
  Top 0.152: v71.25,35.5 71.25,35 72.25,35 R_CL1.1 | v75.75,40 75.25,39.5 75.25,39.25 Q3.1 | 27,34.75 27,27 TP13.TP | 27,34.75 27,51.75 20.75,58 20.75,64.5 U2.18 | 27,34.75 v27.25,34.75
  Bottom 0.152: v75.75,40 v71.25,35.5 70.5,34.75 v27.25,34.75
EPD_BUSY  (via drill 0.35)
  Top 0.152: 88.25,66 88.25,98 88.75,98.5 88.75,99 TP9.TP | 88.25,66 88.25,62.75 89,62 89,49.25 97.5,40.75 97.5,22.25 89.75,14.5 89.75,13.25 87,13.25 85.5,14.75 85.5,15.25 J3.9 | v11.25,66 10.75,65.5 10.75,65 10.5,64.75 U2.26 | 88.25,66 v88,66
  Bottom 0.152: v88,66 v11.25,66
EPD_CS  (via drill 0.35)
  Top 0.152: 70,34.25 70,34.75 R9.1 | 70,34.25 70,29.75 | 70,29.75 70,21.5 78,13.5 78,12.5 81.75,12.5 84,14.75 84,15.25 J3.12 | 70,29.75 75.25,35 75.25,35.25 75.5,35.5 D6.2 | v22,45 20.75,46.25 20.75,47 U2.11 | 70,34.25 v68.75,35.5 | v70.5,37.25 70.5,85.75 83.75,99 TP10.TP
  Bottom 0.152: v22,45 31.5,35.5 v68.75,35.5 v70.5,37.25
EPD_DC  (via drill 0.35)
  Top 0.152: 84.75,14.5 87.75,11.5 98.75,11.5 98.75,6.25 99,6 99,5.25 TP11.TP | 84.75,14.5 84.5,14.75 84.5,15.25 J3.11 | v13.25,45 13.25,46.75 13,47 U2.5 | 84.75,14.5 v83.5,13.25
  Bottom 0.152: v13.25,45 45.75,12.5 82.75,12.5 v83.5,13.25
EPD_RST  (via drill 0.35)
  Top 0.152: v85,22.75 85,15.5 J3.10 | v85,25 86.25,26.25 86.25,98.5 84.25,100.5 78,100.5 78,99.75 77.5,99.25 TP12.TP 77.25,99.25 v76,98 | v17,66.75 17,64.75 U2.21
  Bottom 0.152: v85,25 v85,22.75 | v17,66.75 48.25,98 v76,98
FLASH_CS  (via drill 0.35)
  Top 0.152: U6.1 36.75,60.25 38,59 38,50.5 D9.2 38,50.25 37,50.25 R5.1 36.75,50.25 36.75,50.75 v36.25,51.25 | v25.5,51.25 22.25,48 22.25,47.5 22,47.25 U2.12
  Bottom 0.152: v36.25,51.25 v25.5,51.25
GDR  (via drill 0.35)
  Top 0.152: v89,16.5 89,15.5 J3.2 | v72.75,14.75 70.5,12.5 R4_.2 70.5,14.75 67.25,14.75 65.5,13 Q2.1
  Bottom 0.152: v89,16.5 87.25,14.75 v72.75,14.75
GND  (via drill 0.35)
  Top 0.152: U2.29_5 13.75,54.5 13.75,55.5 U2.29_6 | D12_.1 36.93,35.82 | 36.93,35.82 36.93,42.03 39.42,44.52 39.42,46.28 | D9.1 38.1,47.82 37.78,47.5 | 37.64,47.36 37.78,47.5 | 37.78,47.5 37.78,47.14 v37.62,46.98 | D11_.1 39.77,34.08 40.5,34.08 | 40.5,34.08 41.31,34.08 D10_.1 | 40.5,34.08 40.5,36.2 39.24,37.46 39.06,37.46 39.06,39.08 39.28,39.3 39.8,39.3 | 39.8,39.3 40.04,39.3 | 39.8,39.3 40.02,39.52 v40.24,39.52 | v37.6,40.8 37.6,36.49 36.93,35.82 | U2.29_8 15,54.5 15,55.5 U2.29_9 | v15.75,51.25 15,51.25 15,53 U2.29_7 | v22.5,105.25 22.5,106.25 BOOT_BUTTON.1 | v18.5,109 18.5,108.75 12.75,108.75 12.5,108.5 12.5,102.75 12.25,102.75 12,103 11,103 10.75,102.75 10.75,102.25 8.5,100 8.5,90.25 7,90.25 7,91.25 6.25,92 5.75,92 J2.P6 | v8.25,91 7.25,91 7.25,91.25 7.5,91.5 8.25,91.5 8.25,91.75 8,92 6.5,92 6.5,92.25 7,92.75 7,93 7.25,93.25 8.25,93.25 8.25,93.5 8,93.75 7,93.75 7,94 7.25,94.25 8.25,94.25 8.25,94.5 8,94.75 4.75,94.75 4.75,93.75 4,93.75 3.75,94 3.25,94 3,94.25 2.75,94.25 2.5,94.5 1.75,94.5 1.75,93.75 3.75,93.75 4,94 4.25,94 4.25,94.5 4.5,94.75 4.5,95 4.75,95.25 8.25,95.25 8.25,95.5 8,95.75 4.5,95.75 4.5,96 4.75,96.25 8.25,96.25 8.25,96.5 8,96.75 1.5,96.75 1.5,97 1.75,97.25 8.25,97.25 8.25,97.5 8,97.75 1.5,97.75 1.5,98 1.75,98.25 8.25,98.25 8.25,98.5 8,98.75 1.5,98.75 1.5,99 1.75,99.25 8.25,99.25 8.25,99.5 8,99.75 1.5,99.75 1.5,100 1.75,100.25 8.5,100.25 8.5,100.5 8.25,100.75 1.5,100.75 1.5,101 1.75,101.25 9.5,101.25 9.5,101.5 9.25,101.75 1.5,101.75 1.5,102 1.75,102.25 10.5,102.25 10.5,102.5 10.25,102.75 1.5,102.75 1.5,103 1.75,103.25 12.25,103.25 12.25,103.5 12,103.75 1.5,103.75 1.5,104 1.75,104.25 12.25,104.25 12.25,104.5 12,104.75 1.5,104.75 1.5,105 1.75,105.25 12.25,105.25 12.25,105.5 12,105.75 1.5,105.75 1.5,106 1.75,106.25 12.25,106.25 12.25,106.5 12,106.75 1.5,106.75 1.5,107 1.75,107.25 12.25,107.25 12.25,107.5 12,107.75 1.5,107.75 1.5,108 1.75,108.25 12.25,108.25 12.25,108.5 12,108.75 1.5,108.75 1.5,109 1.75,109.25 18.75,109.25 18.75,108.75 19.5,108.75 19.5,109.25 19.25,109.5 19.25,110 1.25,110 1.25,96.25 1.5,96 3.25,96 3.5,95.75 4.25,95.75 4.25,94.75 3.5,94.75 3.25,94.5 2.75,94.5 2.5,94.75 1.75,94.75 1.75,95.75 3,95.75 3,95 J2.G4
  Top 0.152: v15,91 15.5,90.5 16,90.5 J2.G2 | v2.75,67.5 3.5,67.5 3.5,67.75 3.25,68 2.5,68 2.5,67.5 2.75,67.25 4,67.25 4,67.5 3.25,68.25 2.25,68.25 2.25,67.25 2.5,67 4.5,67 4.5,67.25 3.25,68.5 2,68.5 2,67 2.25,66.75 5,66.75 5,67 3.25,68.75 1.75,68.75 1.75,66.75 2,66.5 5.5,66.5 5.5,66.75 3.25,69 1.5,69 1.5,66.5 1.75,66.25 6,66.25 6,66.5 3.25,69.25 1.25,69.25 1.25,66 6.5,66 6.5,66.25 3.25,69.5 1.25,69.5 1.25,69.75 1.5,70 3.25,70 3.25,70.25 3,70.5 1.25,70.5 1.25,70.75 1.5,71 3.25,71 3.25,71.25 3,71.5 1.25,71.5 1.25,71.75 1.5,72 3.25,72 3.25,72.25 3,72.5 1.25,72.5 1.25,72.75 1.5,73 3.25,73 3.25,73.25 3,73.5 1.25,73.5 1.25,73.75 1.5,74 3.25,74 3.25,74.25 3,74.5 1.25,74.5 1.25,74.75 1.5,75 3.25,75 3.25,75.25 3,75.5 1.25,75.5 1.25,75.75 1.5,76 3.25,76 3.25,76.25 3,76.5 1.25,76.5 1.25,76.75 1.5,77 3.25,77 3.25,77.25 3,77.5 1.25,77.5 1.25,77.75 1.5,78 3.25,78 3.25,78.25 3,78.5 1.25,78.5 1.25,78.75 1.5,79 3.25,79 3.25,79.25 3,79.5 1.25,79.5 1.25,79.75 1.5,80 3.25,80 3.25,80.25 2.75,80.75 1.25,80.75 1.25,80.5 2.75,80.5 3,80.75 3.25,80.75 3.25,81.5 2.25,81.5 2.25,81.75 3.25,81.75 3.25,82.5 3,82.75 2,82.75 2,81.75 J2.G3 | v2.5,83 1.5,83 1.25,83.25 1.25,96 1.5,96.25 4.5,96.25 4.75,96.5 8,96.5 8.25,96.75 8.25,97 1.75,97 1.5,97.25 1.5,97.5 8,97.5 8.25,97.75 8.25,98 1.75,98 1.5,98.25 1.5,98.5 8,98.5 8.25,98.75 8.25,99 1.75,99 1.5,99.25 1.5,99.5 8,99.5 8.25,99.75 8.25,100 1.75,100 1.5,100.25 1.5,100.5 8.25,100.5 8.5,100.75 8.5,101 1.75,101 1.5,101.25 1.5,101.5 9.25,101.5 9.5,101.75 9.5,102 1.75,102 1.5,102.25 1.5,102.5 10.25,102.5 10.5,102.75 10.5,103 1.75,103 1.5,103.25 1.5,103.5 12,103.5 12.25,103.75 12.25,104 1.75,104 1.5,104.25 1.5,104.5 12,104.5 12.25,104.75 12.25,105 1.75,105 1.5,105.25 1.5,105.5 12,105.5 12.25,105.75 12.25,106 1.75,106 1.5,106.25 1.5,106.5 12,106.5 12.25,106.75 12.25,107 1.75,107 1.5,107.25 1.5,107.5 12,107.5 12.25,107.75 12.25,108 1.75,108 1.5,108.25 1.5,108.5 12,108.5 12.5,109 v17.5,109
  Top 0.152: v46.25,105.25 46.25,106.25 46.75,106.25 RESET_BUTTON.1 | v49.25,105.25 50.25,106.25 RESET_BUTTON.2 | v153.75,55 152.75,55 152.5,54.75 D1.5 | v153.75,58.5 154.25,59 154.75,59 C5_USB.2 | v143.25,54.25 143,54 C4_USB.2 | v38.75,55.5 40.5,55.5 40.5,58.25 U6.9 | v37.25,55.75 36.5,56.5 U6.4 | v73.75,34.5 73.75,35.5 74,35.5 D6.1 | C7_.2 82,34.5 v82,33.5 84.25,31.25 84.25,24.25 v85.75,24.25 | v50.5,99 51.75,99 C_DELAY.2 | v45.75,96.75 46.5,97.5 IC2.3 | v86.5,22.75 87,22.25 87.5,22.25 EPD_C5.1 | v69.25,21.25 68,21.25 68,18.25 68.5,17.75 69.25,17.75 69.75,17.25 EPD_C12.1 | v76.5,21.25 76.5,22 76.25,22 EPD_C10.1 | v95.75,58.5 98.75,58.5 102.75,54.5 C10_SUPERCAP.2 | v83.75,62 83.75,60.75 84.25,60.75 U5.13 | J1.A12 J1.B1 | J3.17 81.57,17.17 v81.7,17.3
  Bottom 0.152: v40.24,47.02 37.66,47.02 v37.62,46.98 37.5,47 37.5,48.5 36,48.5 35.75,48.25 19.25,48.25 16.25,51.25 v15.75,51.25 | v40.24,39.52 38.88,39.52 v37.6,40.8 37.54,40.86 | v22.5,105.25 18.5,105.25 v18.5,109 | v15,91 v8.25,91 | v2.75,67.5 2.5,67.75 v2.5,83 | v17.5,109 18.25,108.25 18.25,105.25 18.5,105 46.25,105 v46.25,105.25 v49.25,105.25 | v153.75,58.5 153.75,57.25 | 153.75,57.25 v153.75,55 | 153.75,57.25 143.25,57.25 v143.25,54.25 | v38.75,55.5 37.25,55.5 v37.25,55.75 | v82,33.5 73.75,33.5 v73.75,34.5 | v50.5,99 47.25,99 47.25,98.25 v45.75,96.75 | v85.75,24.25 86.5,23.5 v86.5,22.75 | v76.5,21.25 v69.25,21.25 | v95.75,58.5 85.75,58.5 85.75,60 v83.75,62 | v81.7,17.3 86,17.3 v86.26,17.04
  other vias: 74.74,30 118.96,43.22 122.64,27.7 107.94,27.7 123.44,54.94 79.44,38.9 78.58,36.6 83.92,43.84 11.72,97.34 80.88,57.74 92.62,62.58 37.14,27.98 34.38,30.9
  pour Top: -16.48,-16.43 191.69,-16.43 191.69,133.27 -17.7,133.27 -17.7,-15.21
  pour Bottom: -17.7,-16.43 191.69,-16.43 191.69,133.27 -17.7,133.27
GPIO8
  Top 0.152: R10.1 24.75,44.25 19.5,44.25 19.5,47 U2.10
INT_RTC  (via drill 0.35)
  Top 0.152: R1_PINH1.1 83,63.5 82.5,63 82.5,53.25 v82.75,53 83.25,52.5 83.25,51.25 U5.3 | TP15.TP 5.25,15.25 5.25,16 16.5,27.25 16.5,46.75 16.75,47 U2.8 17,47.25 17,48.25 v19,50.25
  Bottom 0.152: v82.75,53 80,50.25 v19,50.25
IO/BOOT
  Top 0.152: C6.1 27.79,107.85 26,107.85 BOOT_BUTTON.3 25.75,107.85 22.5,107.85 BOOT_BUTTON.4 22.25,107.85 20.93,106.53 R_BOOT.1 21,106.09 21,105.85 24.5,102.35 24.5,64.75 U2.15
IO/CHANGE  (via drill 0.35)
  Top 0.152: 65.25,108.25 66,108.25 67,107.25 67.13,107.25 C10.1 | 61.75,108.25 60.75,108.25 60,107.5 60,107.41 | 60,107.41 59.69,107.09 59.71,107.11 | v14.5,66.75 14.5,65 14.25,64.75 U2.23 | v59.29,105.67 60,106.38 60,107.41 | 60,107.4 59.71,107.11 | 59.71,107.11 58.89,106.28 R_CHANGE.1 | 61.75,108.25 65.25,108.25 | 65.25,108.25 CHANGE_BUTTON.3 | 61.75,108.25 CHANGE_BUTTON.4
  Bottom 0.152: v14.5,66.75 53.42,105.67 v59.29,105.67
MISO  (via drill 0.35)
  Top 0.152: J2.P7 5.75,93 3.75,93 3.75,69.5 7.25,66 9,66 9,64.75 U2.27 9.25,64.5 9.5,64.25 v9.5,63.25 | 35.25,30 33.72,30 33.72,34.14 | 35.25,30 35.5,30 R8.1 35.25,30 | 33.72,34.14 33.72,34.72 34.74,35.74 34.74,57.24 35,57.5 | 36.93,33.59 36.89,33.55 36.74,33.52 | 36.93,33.59 D12_.2 36.75,33.5 36.75,33.56 | 35,57.5 36.5,59 U6.2 | v116.75,9 116.75,5.25 TP6.TP | v38.75,26.25 37.71,26.25 35.25,28.71 35.25,30 | 35,57.5 v34.5,58 | 36.52,33.56 36.75,33.56 | 36.75,33.56 36.86,33.56 | v35.64,32.68 36.55,33.59 36.93,33.59 | v34.52,34.02 34.4,34.14 33.72,34.14
  Bottom 0.152: v116.75,9 116.75,12.5 103,26.25 v38.75,26.25 | v9.5,63.25 14.75,58 v34.5,58 | v35.64,32.68 34.56,33.76 34.56,34 | 34.56,34 34.56,34.02 | 34.56,34 34.5,34 v34.52,34.02
MOSI  (via drill 0.35)
  Top 0.152: U6.5 44.5,56.5 43.5,55.5 43.5,44.87 38.25,39.62 38.25,36.94 D11_.2 39.48,35.38 | v83.25,18.75 83,18.5 83,15.5 J3.14 | v42,25.5 38.25,29.25 38.25,29.75 | 39.07,29.31 38.25,29.75 | 38.25,29.75 R7.1 37.79,29.83 36.72,30.9 36.72,31.82 37.06,32.16 38.1,32.16 38.14,32.2 38.14,34.82 38.7,35.38 39.48,35.38 | v15.75,45 15.75,47 U2.7 15.75,47.25 15.75,48.25 16.5,49 v16.5,58.75 | v7.25,88.5 6,88.5 J2.P3 | TP7.TP 135.75,63.5 131,58.75 124.57,58.75 116.5,50.68 116.5,38.53 105.25,27.29 v105.25,23 | 39.48,35.38 39.07,35.78
  Bottom 0.152: v15.75,45 35.25,25.5 v42,25.5 47.45,20.05 81.95,20.05 v83.25,18.75 101,18.75 v105.25,23 | v7.25,88.5 10.5,85.25 10.5,64.25 11,64.25 v16.5,58.75
N$1  (via drill 0.35)
  Top 0.152: R2.1 150.15,42.87 151.32,44.04 v151.64,44.04 | v158.46,47.36 158.46,49.71 158.53,49.78 159.01,49.78 159.15,49.92 159.93,49.92 159.93,49.96 J1.A4
  Bottom 0.152: v151.64,44.04 155.66,48.06 158.16,48.06 158.46,47.76 v158.46,47.36
N$2  (via drill 0.35)
  Top 0.152: v154,49.75 152,49.75 R2_USB1.2 | J1.A5 159.75,51.2 157.53,51.2 v157.26,51.47
  Bottom 0.152: v154,49.75 155.72,51.47 v157.26,51.47
N$3
  Top 0.152: R2_USB.1 150.5,46.75 153.5,43.75 153.5,38.75 154,38.25 156.55,38.25 156.55,53.31 157.44,54.2 159.75,54.2 J1.B5
N$4
  Top 0.152: 119,32.25 119,30.75 118,30.75 IC1.3 117.75,31 113.25,31 C1_BAT1.1 | 119,32.25 118.5,32.75 118,32.75 IC1.1 | Q1.2 130.5,37 130.5,29.5 129.75,29.5 D2.1 129.5,29.5 129.5,30 128.5,31 128.5,34.75 121.5,34.75 119,32.25
N$5
  Top 0.152: C4_.1 96.5,38.75 93.25,38.75 93.25,39.25 D3_.2 93,39.25 93,39 89.75,35.75 D4_.1
N$6
  Top 0.152: C1_BAT2.2 115,26.5 115.75,25.75 127.5,25.75 127.5,28 127.75,28.25 127.75,31 125.75,33 125.75,33.25 C3.-
N$7  (via drill 0.35)
  Top 0.152: v77,15.5 78,15.5 J3.24 | v68.75,18.5 69.75,18.5 EPD_C12.2
  Bottom 0.152: v77,15.5 75.25,17.25 70,17.25 v68.75,18.5
N$8
  Top 0.152: J3.4 88,15.5 88,18.5 91.25,21.75 91.25,22.75 90.25,23.75 EPD_C1.2
N$9
  Top 0.152: C_DELAY.1 51.8,97.93 50.3,97.93 50.3,98.18 49.55,98.93 49.55,99.43 IC2.5
N$10  (via drill 0.35)
  Top 0.152: v115.75,48.75 115.75,49.5 115,49.5 R2_BAT.2 | v125.75,46.5 126.25,46 126.75,46 U1.5
  Bottom 0.152: v115.75,48.75 118,46.5 v125.75,46.5
N$11  (via drill 0.35)
  Top 0.152: v87.5,21.25 87.5,15.5 J3.5 | v88.25,24.5 88.75,24 88.75,23.75 EPD_C2.2
  Bottom 0.152: v87.5,21.25 87.5,24.5 v88.25,24.5
N$12
  Top 0.152: J3.22 79,15.5 79,17.75 75.25,21.5 75.25,23 76,23.75 EPD_C10.2
N$13
  Top 0.152: R_CAPACITOR.1 100.25,52.75 95,52.75 95,62 93.75,63.25 91.25,63.25 91.25,63.5 D7_.1
N$14
  Top 0.152: R1_BAT.2 121.25,48.5 120.75,49 120.75,50.25 121,50.5 128.25,50.5 128.25,46.5 128.75,46 129.5,46 U1.1
N$15
  Top 0.152: R1_BAT.1 120,49.5 CHG_LED.C
N$16  (via drill 0.35)
  Top 0.152: v80,21.25 80,15.5 J3.20 | v79.5,24.5 78.75,23.75 EPD_C8.2
  Bottom 0.152: v80,21.25 80,24.5 v79.5,24.5
N$17
  Top 0.152: J3.19 80.5,15.5 80.5,18.19 82,19.69 82,21.25 82.5,21.75 82.5,23.75 82,24.25 80.25,24.25 80.25,23.75 EPD_C7.2
N$18  (via drill 0.35)
  Top 0.152: v81.88,18.65 81,17.77 81,15.5 J3.18 | v80.69,19.44 81.5,20.25 81.5,21.25 82,21.75 82,23.25 81.5,23.75 EPD_C6.2
  Bottom 0.152: v81.88,18.65 81.88,19.44 v80.69,19.44
PREVGH  (via drill 0.35)
  Top 0.152: v78.72,21.19 79.5,20.41 79.5,15.5 J3.21 | EPD_C9.2 77.5,23.75 77.5,27.77 v78.65,28.92 78.96,28.92 v80.18,27.7 80.72,27.16 v80.72,25.46 | D5.1 80.75,45.5 78.67,43.42 78.67,38.17 79.9,36.94 82.64,36.94 v82.94,37.24
  Bottom 0.152: v78.72,21.19 78.65,21.26 78.65,25.28 79.13,25.76 79.24,25.76 79.54,25.46 v80.72,25.46 | v82.94,37.24 82.94,33.21 v78.65,28.92
PREVGL  (via drill 0.35)
  Top 0.152: v76.5,18 78.5,16 78.5,15.5 J3.23 | v72.25,18 71.75,18.5 71.25,18.5 EPD_C11.2 | v88.75,18 91.75,21 91.75,35.5 93,35.5 D4_.2
  Bottom 0.152: v72.25,18 v76.5,18 76.52,18.02 88.73,18.02 v88.75,18
RESE  (via drill 0.35)
  Top 0.152: 65.5,8.25 65.5,7.75 SJ1.2 | 65.5,8.25 65.5,10 R2_.2 65.5,10.25 66.75,10.25 66.75,12.75 | R3_.1 67.25,7 65.75,7 65.75,7.5 SJ1.2 | 65.5,8.25 67.25,8.25 R3_.2 | 65.5,8.25 SJ1.2 | v88.5,14.25 88.5,15.25 J3.3 | 66.75,12.75 v68,14 | 66.75,12.75 Q2.2
  Bottom 0.152: v88.5,14.25 88.25,14 v68,14
RESET  (via drill 0.35)
  Top 0.152: 48.3,107.68 50.29,107.68 RESET_BUTTON.3 50.42,107.94 51.77,106.59 C5.1 | 48.3,107.68 47.84,107.68 RESET_BUTTON.4 | 45.55,102.68 45.55,106.33 R_RESET.1 | 45.55,102.68 45.55,100.68 46.55,99.68 IC2.1 46.8,99.43 47.3,99.43 48,98.73 48,64 v45.5,61.5 | v10.75,48.5 10.75,47.5 10.5,47.25 U2.3 | 48.3,107.68 48.3,105.43 45.55,102.68
  Bottom 0.152: v10.75,48.5 19.5,57.25 41.25,57.25 v45.5,61.5
RTC_RTS  (via drill 0.35)
  Top 0.152: v33.35,53.3 23.5,63.15 23.5,64.25 23.25,64.5 U2.16 | v83.5,53.75 84.5,52.75 84.5,51.25 U5.4
  Bottom 0.152: v33.35,53.3 33.57,53.08 81.83,53.08 82.5,53.75 v83.5,53.75
RX  (via drill 0.35)
  Top 0.152: v13.25,63.25 13.25,64.25 13,64.5 U2.24 | v21.5,58.75 33.14,47.11 33.14,15.86 45.5,3.5 57.5,3.5 57.5,4.25 58.25,5 TP2.TP
  Bottom 0.152: v13.25,63.25 17.75,58.75 v21.5,58.75
SCK  (via drill 0.35)
  Top 0.152: 41.27,37.52 40.67,36.92 D10_.2 42.91,35.97 42.91,28.17 | 41.27,37.52 45.5,41.75 45.5,57 44.75,57.75 U6.6 | v14.5,45.75 14.5,46.75 14.25,47 U2.6 | 41.27,37.52 v40.89,37.9 | v4.5,90.5 4.5,90.75 5.75,90.75 J2.P5 | v84,19.5 84,18.5 83.5,18 83.5,15.5 J3.13 | 42.91,28.17 v50.34,20.74 | R6.1 40.75,29.75 41.25,29.75 42.91,28.09 42.91,28.17 | v117.25,44.25 117.25,51 123,51 130.25,58.25 135.75,58.25 TP8.TP | v98.25,25.5 v101.75,29
  Bottom 0.152: v40.89,37.9 31.85,37.9 24,45.75 v14.5,45.75 8.75,45.75 8.75,64.25 6.75,66.25 6.5,66.25 6.5,88.5 v4.5,90.5 | v50.34,20.74 50.56,20.52 82.98,20.52 v84,19.5 92.25,19.5 v98.25,25.5 | v117.25,44.25 102,29 v101.75,29
SCL  (via drill 0.35)
  Top 0.152: v18.25,63.25 18.25,64.5 U2.20 | v80.25,62.25 80.5,62 80.5,60.75 U5.16 | 152,5.5 152,3.25 151.25,3.25 R2-PINH.1 | 152,5.5 151.5,6 151.5,6.25 SENSOR2.4 | 139.75,51 144,51 144,41.25 v163.75,21.5 164.25,21 164.25,20.75 J4.4 | 139.75,51 138.25,51 U4.7 | v151.75,5.5 152,5.5 | v139.5,53.5 139.75,53.25 139.75,51
  Bottom 0.152: v18.25,63.25 19.25,62.25 v80.25,62.25 85.25,57.25 135.75,57.25 v139.5,53.5 | v151.75,5.5 163.75,17.5 v163.75,21.5
SDA  (via drill 0.35)
  Top 0.152: v19.5,63.25 19.5,64.5 U2.19 | v80.5,63.25 82,61.75 82,60.75 U5.15 | 152,7.25 152.5,6.75 152.5,2.25 150.5,2.25 150.25,2.5 150.25,2.75 150,3 R1_PINH.1 | 152,7.25 151.5,7.25 SENSOR2.3 | 138.75,52 138.25,51.5 U4.8 | v139,45.75 163,21.75 163,20.25 163.25,20 | 163.25,20 163.75,19.5 164.25,19.5 J4.3 | 152,7.25 162.25,17.5 162.25,19 163.25,20 | 138.75,52 v138.75,55.25 | 138.75,52 v139,52
  Bottom 0.152: v19.5,63.25 v80.5,63.25 86,57.75 136.25,57.75 v138.75,55.25 | v139,45.75 v139,52
SRC  (via drill 0.35)
  Top 0.152: v91,45.75 96.5,40.25 C4_.2 | v66,27 66,15.25 Q2.3 | v79.27,41.5 79.27,41.52 83.47,45.72 D5.2 84.5,45.75 v85.5,45.75 85.6,45.65 85.6,43.96 85.29,43.65 85.18,43.65 | 85.09,43.65 85.18,43.65 | 85.18,43.65 84.4,42.87 L1.1
  Bottom 0.152: v85.5,45.75 v91,45.75 | v79.27,41.5 66,28.23 v66,27
SS_SD  (via drill 0.35)
  Top 0.152: 15,98 12.25,100.75 11.5,100.75 R10_.1 | 15,98 17.25,98 17.25,99 D8.2 | v11,63.25 11,53 11.5,52.5 11.5,47.25 U2.4 | v7.25,67 7,67.25 7,87.25 | 7,87.25 6.75,87.5 6.25,87.5 J2.P2 | 15,98 9.5,92.5 9.5,89.72 9.16,89.37 9.12,89.37 7,87.25
  Bottom 0.152: v7.25,67 v11,63.25
TX  (via drill 0.35)
  Top 0.152: v15.75,52.25 15.75,56.25 12,60 12,64.25 11.75,64.5 U2.25 | v93.5,45.75 104.5,34.75 104.5,6 105.25,5.25 TP1.TP
  Bottom 0.152: v15.75,52.25 19.25,48.75 35.25,48.75 35.5,49 90.25,49 v93.5,45.75
USB_D+  (via drill 0.35)
  Top 0.152: v144.75,46 152.25,53.5 D1.4 | v25,45.75 24.5,46.25 24.5,47 U2.14
  Bottom 0.152: v144.75,46 143.75,45 25.75,45 v25,45.75
USB_D-  (via drill 0.35)
  Top 0.152: v152.5,56.5 152.5,55.75 D1.6 | v24.75,49.5 23.25,48 23.25,47.25 U2.13
  Bottom 0.152: v152.5,56.5 148.75,52.75 93.5,52.75 90.25,49.5 v24.75,49.5
VBAT
  Top 0.152: U4.3 136.25,50.5 136.25,51 U4.2 136,51 134.25,51 134.25,49.75 132.5,48 132.05,48 | 132.05,48 129.75,48 U1.3 | 129.5,42.5 124.5,42.5 C2_BAT.1 | 129.5,39.75 129.5,39.25 Q1.3 | 129.5,39.75 129.5,42.5 | 129.5,39.75 131.5,37.75 131.5,24.75 112,5.25 TP3.TP | 132.05,48 132.05,45.05 129.5,42.5
VBUS  (via drill 0.35)
  Top 0.3: 132.5,50.25 133.25,50.25 C1_BAT.1 | 141.25,55 141.25,53.25 142,52.5 C4_USB.1 | 141.25,55 141.25,56 136.67,56 132.5,51.83 132.5,50.25 | 154.75,57.75 152,57.75 152,57 151,56 151,55 150.5,54.5 150,54.5 D1.2 149.75,54.5 149.25,54.5 148.75,55 141.25,55 | 154.75,57.75 154.75,40.75 R2.2 | 154.75,57.75 C5_USB.1 | D2.2 129.5,31.75 129,32.25 129,36.5 128.75,36.75 128.75,37 Q1.1 128.5,37.25 115.75,37.25 | 126.75,49.5 122.25,49.5 | 122.25,49.5 121.5,49.5 CHG_LED.A | 126.75,49.5 126.75,48 U1.4 | 112,33 112,33.5 115.75,37.25 | 112,33 112,32.5 R1_PWRUSB.2 | 115.75,37.25 122.25,43.75 122.25,49.5 | v9.25,10.25 5.25,10.25 TP14.TP | v105.25,22 110.75,27.5 110.75,31.75 112,33 | v129,50.25 132.5,50.25 | 126.75,49.5 v127,49.75
  Bottom 0.3: v9.25,10.25 11,12 95.25,12 v105.25,22 | v129,50.25 128.5,49.75 v127,49.75
VRTC  (via drill 0.35)
  Top 0.152: 101.25,51.75 102.75,51.75 102.75,52 C10_SUPERCAP.1 | 101.25,51.75 93.2,51.75 | 93.2,51.75 93,51.75 91.5,50.25 v90.75,51 | 93.2,51.75 C8.1 | 101.25,51.75 101.25,54 100.5,54 R_CAPACITOR.2 | v85.5,55.75 83.25,58 83.25,60.5 U5.14
  Bottom 0.152: v85.5,55.75 90.25,51 v90.75,51
VUSB  (via drill 0.35)
  Top 0.152: v157.78,55.74 158,55.52 158.73,55.52 159.05,55.2 159.79,55.2 J1.A9 J1.B4 | v157.58,50.08 158.39,50.08 158.75,50.44 159.75,50.44 J1.B9
  Bottom 0.152: v157.58,50.08 158.46,50.96 158.46,54.54 157.78,55.22 v157.78,55.74
(copper drawn outside any net)
  shapes: Top area x14